# Altium PCB KeyLegendrePCB.PcbDoc
Units mm, origin at the board's own origin, x right, y up, seen from the top; angles counter-clockwise.
Board outline 75 x 50 mm, 2 copper layers (Top Layer, Bottom Layer); 27 components, 18 nets, 74 pads, 0 vias.
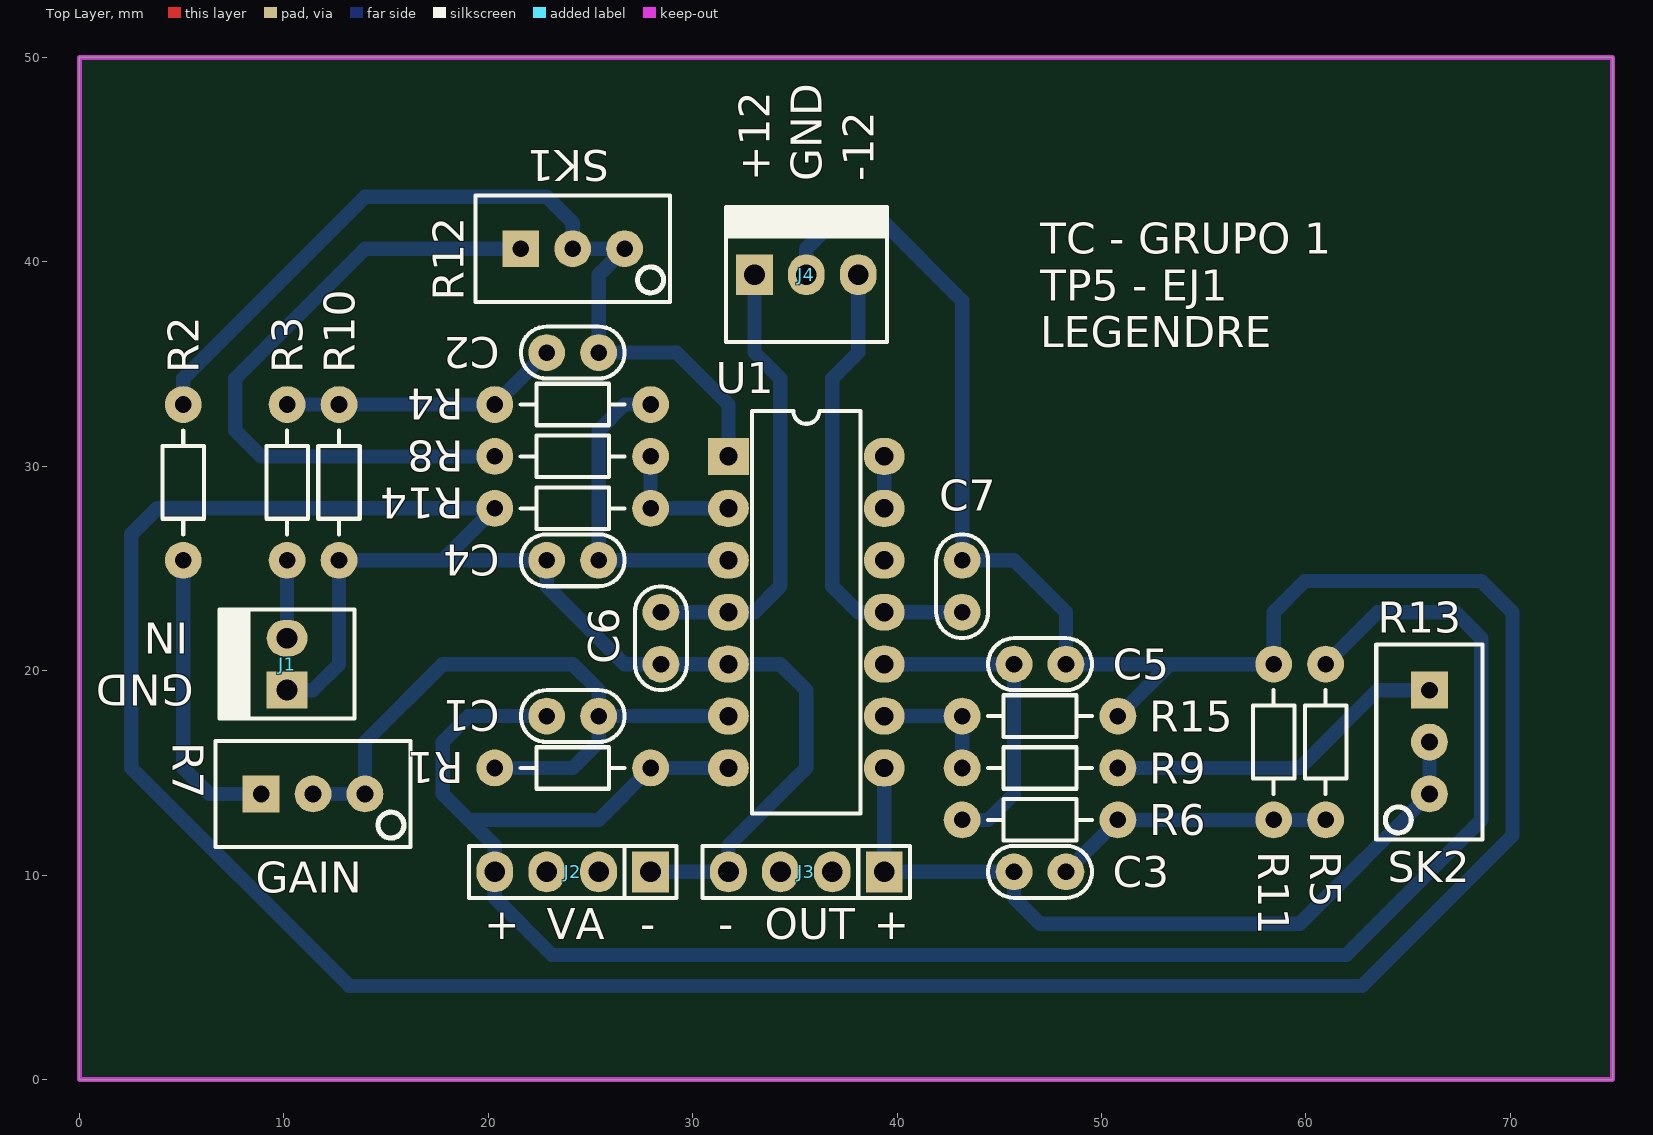
[diagram p0: Top Layer view]
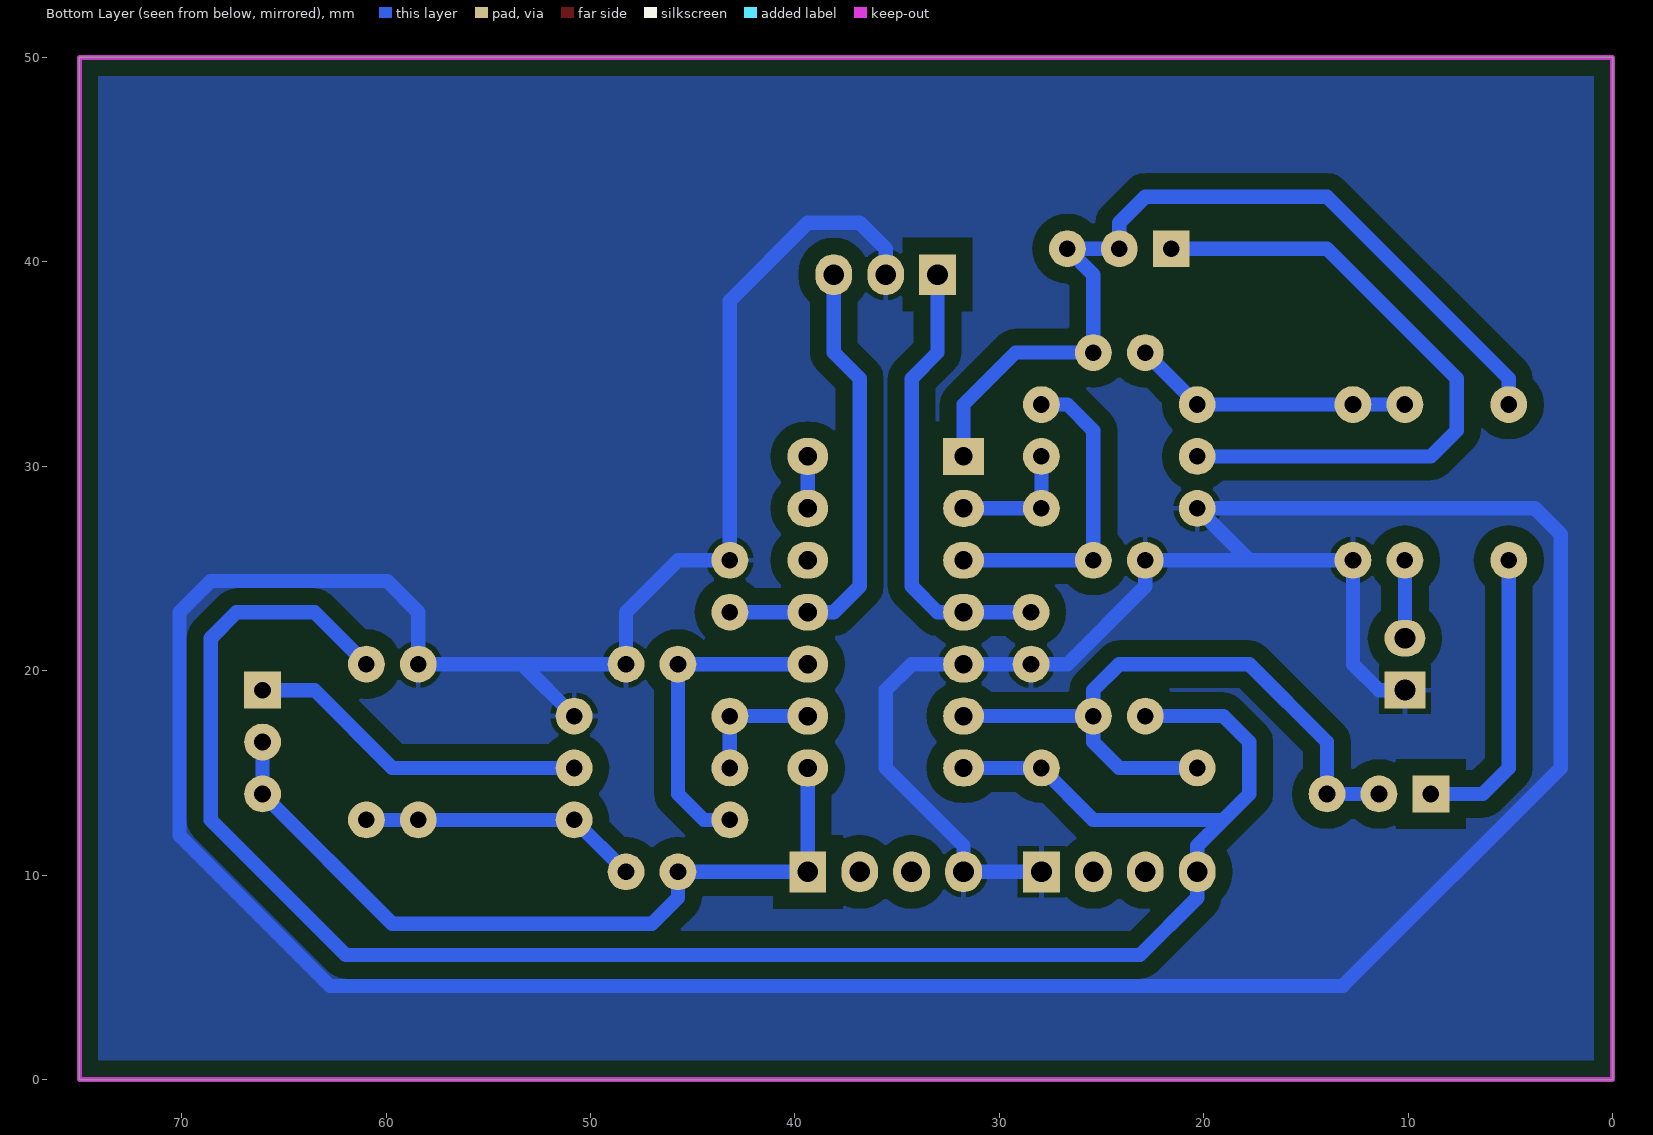
[diagram p1: Bottom Layer view, seen from below]
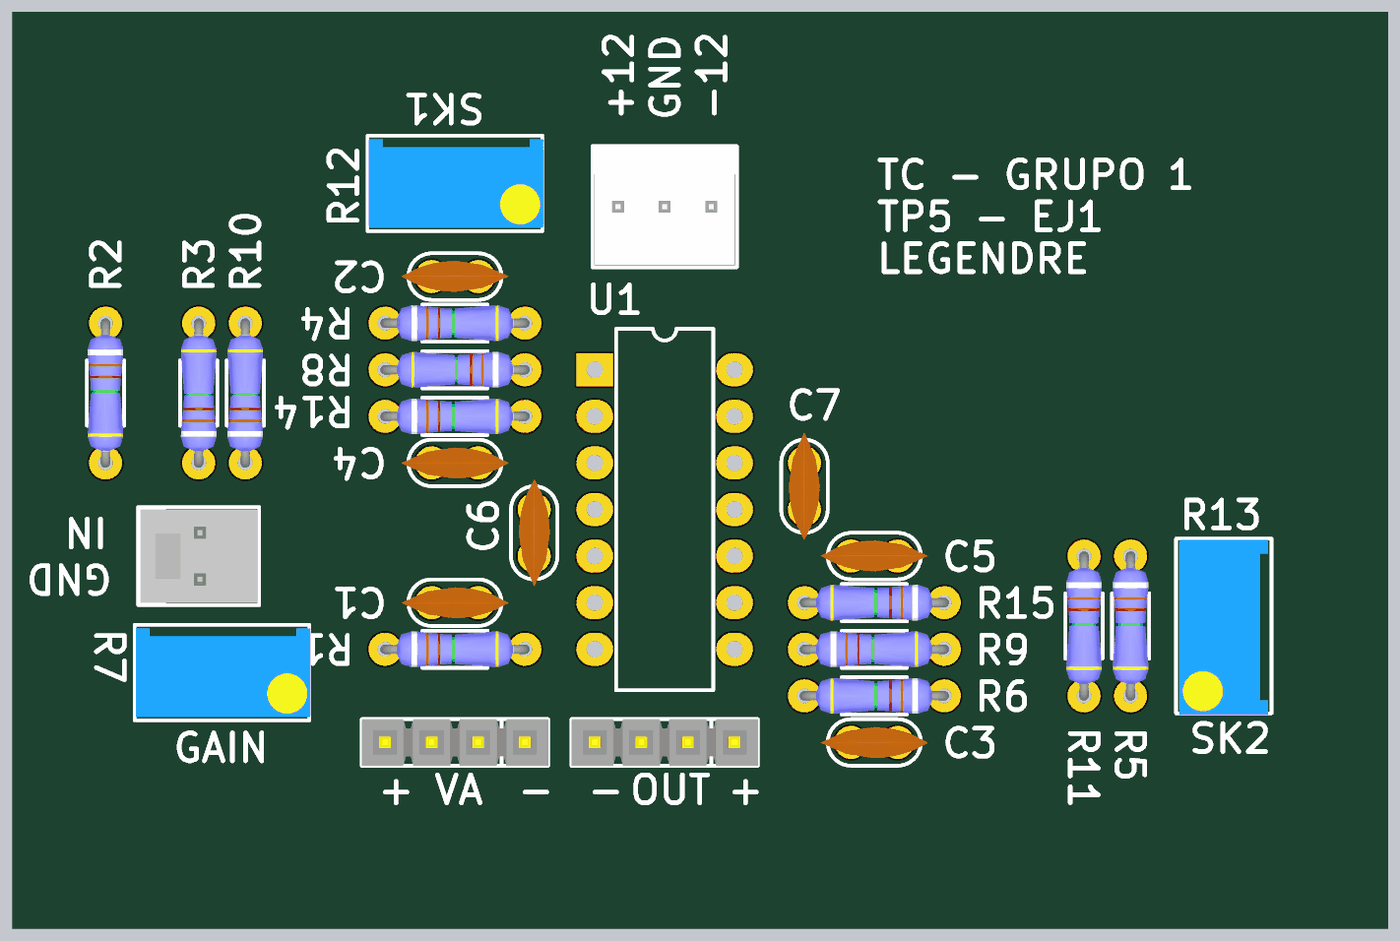
[diagram p2: 3D render of the assembled board from above, using the file's embedded part models]

## Layer stack, top to bottom
Top Solder: solder mask 0.0102, Solder Resist, Dk 3.5
Top Layer: signal copper 0.0356
Dielectric 1: dielectric 0.32, FR-4, Dk 4.8
Bottom Layer: signal copper 0.0356
Bottom Solder: solder mask 0.0102, Solder Resist, Dk 3.5

## Board outline
0,0 0,50 75,50 75,0

## Design rules (kind name [scope] priority, off if disabled: settings)
Clearance [All] p1: gap=0.7
PolygonConnect [All] p1: connectstyle=Relief reliefconductorwidth=0.254 reliefentries=4 polygonreliefangle="90 Angle" airgapwidth=0.254
RoutingVias [All] p1: holewidth=0.711 width=1.8 viastyle="Through Hole" minholewidth=0.711 minwidth=1.8 maxholewidth=0.711 maxwidth=1.8
SolderMaskExpansion [All] p1: expansion=0.102
Width [All] p1: maxlimit=0.7 minlimit=0.7 preferedwidth=0.7
30 further rules are at their usual default settings.

## Components (designator, comment, footprint, x,y, rotation, side; value= is the part's Value field where it differs from the comment)
C1 "10n" CAP100 24.13,17.78 r180 top
C2 "150p" CAP100 24.13,35.56 r0 top
C3 "3.3n" CAP100 46.99,10.16 r180 top
C4 "150p" CAP100 24.13,25.4 r180 top
C5 "3.3n" CAP100 46.99,20.32 r0 top
C6 "100n" CAP100 28.448,21.59 r270 top
C7 "100n" CAP100 43.18,24.13 r90 top
J1 "VIN" MOLEX2 10.16,19.05 r90 top
J2 "VA" SIP4 24.13,10.16 r180 top
J3 "VOUT" SIP4 35.56,10.16 r180 top
J4 "FUENTE" MOLEX3 33.02,39.37 r0 top
R1 "1K" RES300 20.32,15.24 r0 top
R2 "1K" RES300 5.08,33.02 r270 top
R3 "68K" RES300 10.16,25.4 r90 top
R4 "47K" RES300 20.32,33.02 r0 top
R5 "4.7K" RES300 60.96,20.32 r270 top
R6 "1.5K" RES300 50.8,12.7 r180 top
R7 "500" "PRESET V" 11.43,13.97 r0 top
R8 "1K" RES300 27.94,30.48 r180 top
R9 "1.5K" RES300 43.18,15.24 r0 top
R10 "150K" RES300 12.7,25.4 r90 top
R11 "2.2K" RES300 58.42,20.32 r270 top
R12 "100" "PRESET V" 24.13,40.64 r0 top
R13 "100" "PRESET V" 66.04,16.51 r270 top
R14 "1.2K" RES300 20.32,27.94 r0 top
R15 "1K" RES300 50.8,17.78 r180 top
U1 "TL084ACN" 646-06 35.56,22.86 r270 top

## Footprints (in the part's own frame and the unit in brackets; to place one, negate y for a bottom-side part, rotate by r counter-clockwise, add the part's x,y. Pads: shape width x height; smd on the part's side, far side on the other; paste and mask are expansions set on the pad)
646-06 [mm] "DIP; 14 Leads; Row Spacing 7.62 mm; Pitch 2.54 mm"
  rect 1.8x2 hole 0.9: 1(-7.62,-3.81)
  oval 1.8x2 hole 0.9: 2(-5.08,-3.81) 3(-2.54,-3.81) 4(0,-3.81) 5(2.54,-3.81) 6(5.08,-3.81) 7(7.62,-3.81) 8(7.62,3.81) 9(5.08,3.81) 10(2.54,3.81) 11(0,3.81) 12(-2.54,3.81) 13(-5.08,3.81) 14(-7.62,3.81)
  silkscreen extent -9.85,-2.65 9.85,2.65
CAP100 [mm]
  round 1.8 hole 0.813: 1(-1.27,0) 2(1.27,0)
  silkscreen extent -2.54,-1.27 2.54,1.27, body extent -2.92,-0.84 2.92,0.86, height 6.12
MOLEX2 [mm]
  rect 1.8x2 hole 1.016: 1(0,0)
  oval 1.8x2 hole 1.016: 2(2.54,0)
  silkscreen extent -1.4,-3.3 3.94,3.3, body extent -1.27,-3.17 3.81,3.18, height 10.74
MOLEX3 [mm]
  rect 1.8x2 hole 1.016: 1(0,0)
  oval 1.8x2 hole 1.016: 2(2.54,0) 3(5.08,0)
  silkscreen extent -1.4,-3.3 6.48,3.3, body extent -1.27,-3.17 6.35,3.17, height 10.74
"PRESET V" [mm]
  rect 1.8x1.8 hole 0.813: 1(-2.54,0)
  round 1.8 hole 0.813: 2(0,0) 3(2.54,0)
  silkscreen extent -4.76,-2.6 4.76,2.6, body extent -4.7,-2.42 4.83,2.42, height 11.55
RES300 [mm]
  round 1.8 hole 0.813: 1(0,0) 2(7.62,0)
  silkscreen extent 1.27,-1.02 6.35,1.02, body extent -0.25,-0.97 7.87,0.97, height 2.01
SIP4 [mm]
  rect 1.8x2 hole 1.016: 1(-3.81,0)
  oval 1.8x2 hole 1.016: 2(-1.27,0) 3(1.27,0) 4(3.81,0)
  silkscreen extent -5.08,-1.27 5.08,1.27, body extent -5.08,-1.27 5.08,1.27, height 8.38

## Part data
C1 C2 C3 C4 C5 C6 C7: library part CAP
J1: library part MOLEX2
J2 J3: library part CON4
J4: library part MOLEX3
R1 R2 R3 R4 R5 R6 R8 R9 R10 R11 R14 R15: library part RES
R7 R12 R13: library part PRESET
U1: "JFET-Input Operational Amplifier"

## Nets (pads, with @x,y where several pads share a name; then routed paths per layer and width w, separated by ;. In a path a pad name is that pad's centre, name@x,y a point inside that pad or via, vN(x,y) a via of type N, cw(c..) or ccw(c..) an arc to the next point about the centre after c; other vN are vias at no path point)
+12V: C6.1 J4.1 U1.4 | length 22.1
  Bottom Layer w0.7: C6.1 U1.4 33.02,22.86 34.29,24.13 34.29,34.29 33.02,35.56 J4.1
-12V: C7.1 J4.3 U1.11 | length 22.6
  Bottom Layer w0.7: J4.3 38.1,35.56 36.83,34.29 36.83,24.13 38.1,22.86 U1.11 C7.1
GND: C4.2 C5.2 C6.2 C7.2 J1.1 J2.1 J3.4 J4.2 R10.1 R11.1 R14.1 R15.1 U1.5 | length 229.5
  Bottom Layer w0.7: J1.1 11.43,19.05 12.7,20.32 R10.1 17.78,25.4 ; J2.1 J3.4 31.75,11.43 35.56,15.24 35.56,19.05 34.29,20.32 U1.5 C6.2 26.67,20.32 22.86,24.13 C4.2 17.78,25.4 ; J4.2 35.56,40.64 36.83,41.91 39.37,41.91 43.18,38.1 C7.2 45.72,25.4 48.26,22.86 C5.2 53.34,20.32 ; R15.1 53.34,20.32 ; 17.78,25.4 R14.1 3.81,27.94 2.54,26.67 2.54,15.24 13.208,4.572 62.738,4.572 70.104,11.938 70.104,22.86 68.58,24.384 59.944,24.384 58.42,22.86 R11.1 53.34,20.32
NetC1_1: C1.1 R1.1 R7.2 R7.3 U1.6 | length 33.1
  Bottom Layer w0.7: R7.2 R7.3 13.97,16.51 17.78,20.32 24.13,20.32 25.4,19.05 C1.1 ; R1.1 24.13,15.24 25.4,16.51 C1.1 ; U1.6 C1.1
NetC1_2: C1.2 J2.4 R1.2 R5.1 U1.7 | length 98.3
  Bottom Layer w0.7: C1.2 19.05,17.78 17.78,16.51 17.78,13.97 19.05,12.7 ; U1.7 R1.2 25.4,12.7 19.05,12.7 ; R5.1 63.5,22.86 67.31,22.86 68.58,21.59 68.58,12.7 61.976,6.096 23.114,6.096 20.32,8.89 J2.4 20.32,11.43 19.05,12.7
NetC2_1: C2.1 R3.2 R4.1 R10.2 | length 13.8
  Bottom Layer w0.7: R3.2 R10.2 R4.1 C2.1
NetC2_2: C2.2 R2.1 R12.2 R12.3 U1.1 | length 43.9
  Bottom Layer w0.7: R2.1 5.08,34.29 13.97,43.18 22.86,43.18 24.13,41.91 R12.2 R12.3 25.4,39.37 C2.2 29.21,35.56 31.75,33.02 U1.1
NetC3_1: C3.1 R5.2 R6.1 R11.2 | length 13.8
  Bottom Layer w0.7: C3.1 R6.1 R11.2 R5.2
NetC3_2: C3.2 J3.1 R13.2 R13.3 U1.8 | length 38.7
  Bottom Layer w0.7: U1.8 J3.1 C3.2 45.72,8.89 46.99,7.62 59.69,7.62 R13.3 R13.2
NetC4_1: C4.1 R4.2 U1.3 | length 15.8
  Bottom Layer w0.7: R4.2 26.67,33.02 25.4,31.75 C4.1 U1.3
NetC5_1: C5.1 R6.2 U1.10 | length 15.8
  Bottom Layer w0.7: U1.10 C5.1 45.72,13.97 44.45,12.7 R6.2
NetJ1_2: J1.2 R3.1 | length 3.8
  Bottom Layer w0.7: J1.2 R3.1
NetR2_2: R2.2 R7.1 | length 14.5
  Bottom Layer w0.7: R2.2 5.08,15.24 6.35,13.97 R7.1
NetR8_1: R8.1 R14.2 U1.2 | length 6.3
  Bottom Layer w0.7: R8.1 R14.2 U1.2
NetR8_2: R8.2 R12.1 | length 32.4
  Bottom Layer w0.7: R8.2 8.89,30.48 7.62,31.75 7.62,34.29 13.97,40.64 R12.1
NetR9_1: R9.1 R15.2 U1.9 | length 6.3
  Bottom Layer w0.7: U1.9 R15.2 R9.1
NetR9_2: R9.2 R13.1 | length 16.8
  Bottom Layer w0.7: R9.2 59.69,15.24 63.5,19.05 R13.1
NetU1_13: U1.13 U1.14 | length 2.5
  Bottom Layer w0.7: U1.13 U1.14
pads on no net: J2.2 J2.3 J3.2 J3.3 U1.12

## Polygon pours and split planes (outlines as drawn)
GND on Bottom Layer "Top Overlay-No Net" (solid, remove dead copper, pour order 2): 0,50 75,50 75,0 0,0

## Keep-outs
Keep-Out Layer:
  the board outline again, w0.254

## Silkscreen, mask and mechanical layers (free items; w line width, h text height)
Top Overlay:
  text "SK1" at 25.908,45.466 h1.52 r180
  text "+12" at 33.782,43.942 h1.52 r90
  text "GND" at 36.322,43.942 h1.52 r90
  text "-12" at 38.862,43.942 h1.52 r90
  text "TC - GRUPO 1" at 46.99,40.386 h1.52
  text "TP5 - EJ1" at 46.99,38.1 h1.52
  text "LEGENDRE" at 46.99,35.814 h1.52
  text "IN" at 5.334,22.352 h1.52 r180
  text "GND" at 5.588,19.812 h1.52 r180
  text "SK2" at 64.008,9.652 h1.52
  text "GAIN" at 8.636,9.144 h1.52
  text "+" at 19.812,6.858 h1.52
  text "VA" at 22.86,6.858 h1.52
  text "-" at 27.432,6.858 h1.52
  text "-" at 31.242,6.858 h1.52
  text "OUT" at 33.528,6.858 h1.52
  text "+" at 38.862,6.858 h1.52